# Altium PCB Motor_Breakout.PcbDoc
Units mil, origin at the board's own origin, x right, y up, seen from the top; angles counter-clockwise.
Board outline 3000 x 4000 mil, 2 copper layers (Top Layer, Bottom Layer); 23 components, 18 nets, 92 pads, 72 vias.
Unrouted connection lines stored in the file: 3.
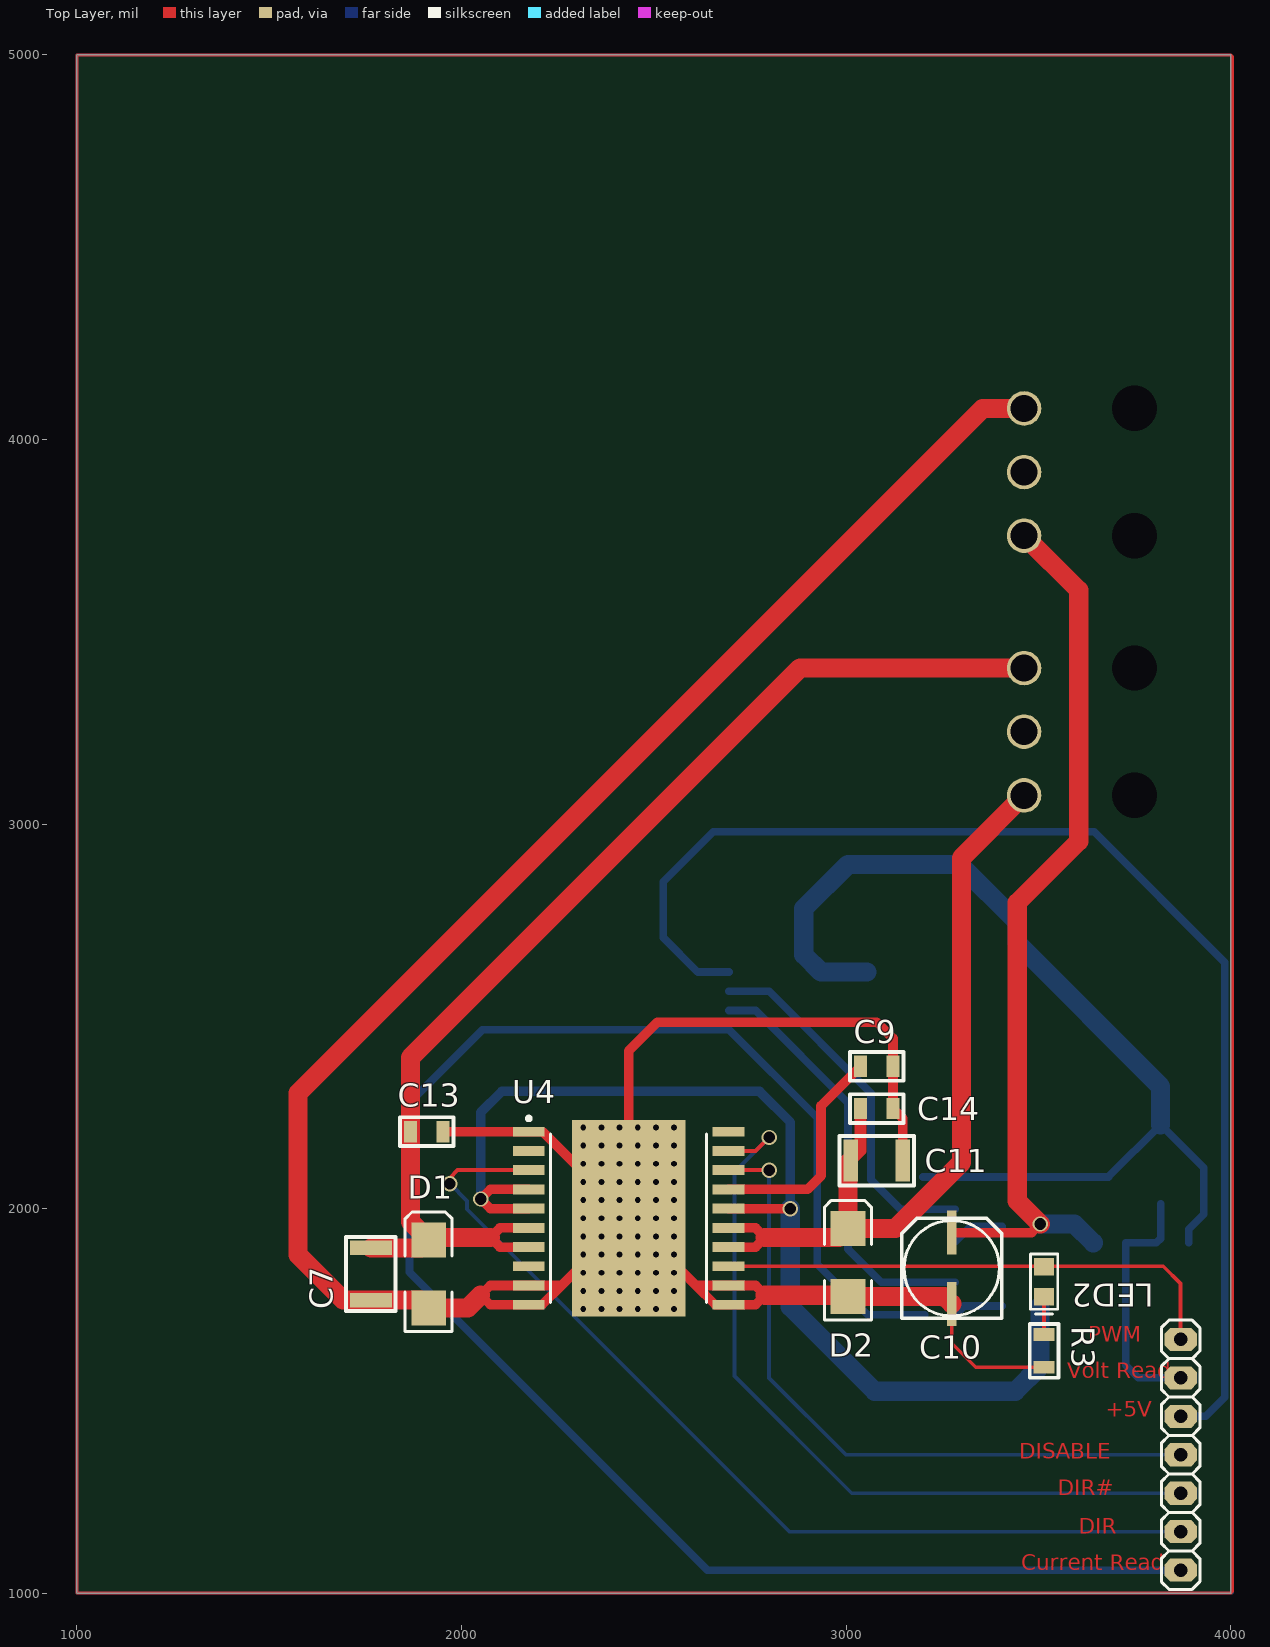
[diagram p0: Top Layer view]
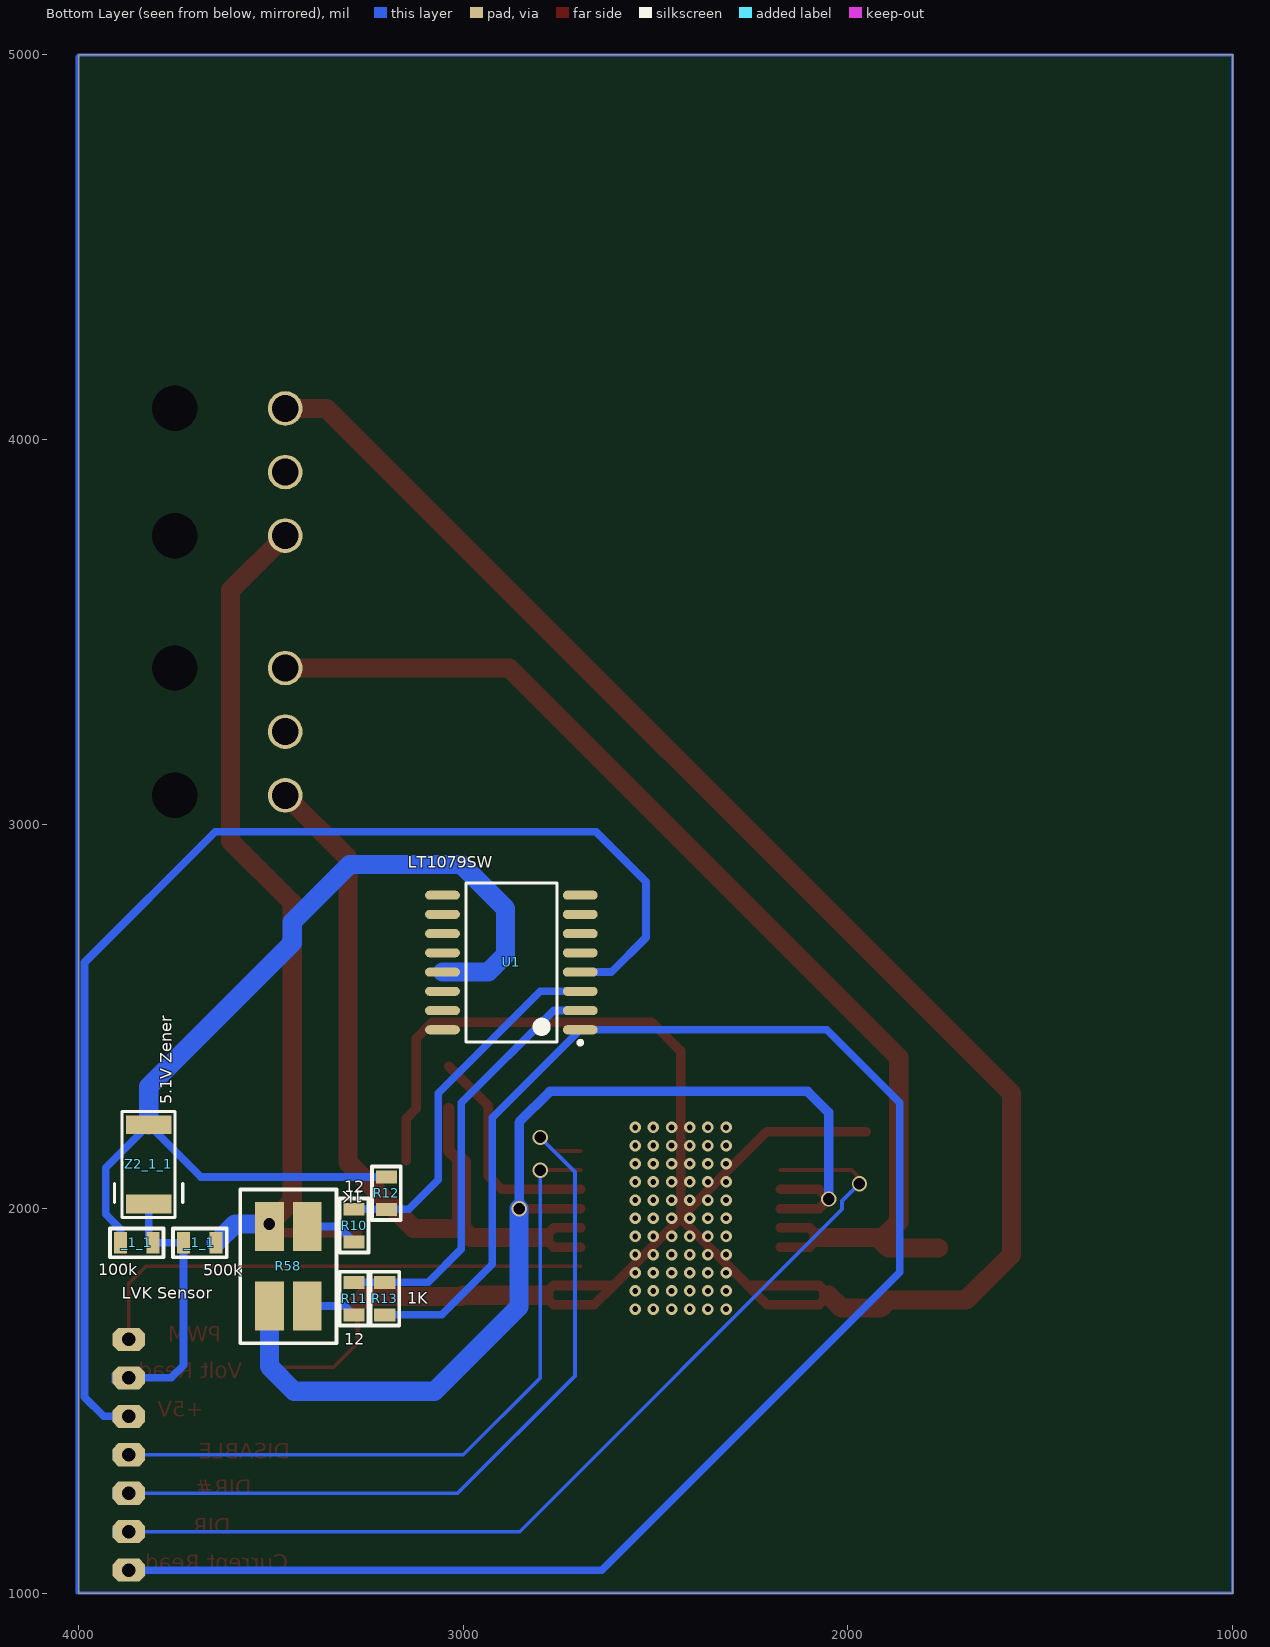
[diagram p1: Bottom Layer view, seen from below]

## Layer stack, top to bottom
Top Layer: signal copper 1.4
Dielectric: dielectric 12.6, FR-4, Dk 4.8
Bottom Layer: signal copper 1.4

## Board outline
1000,1000 4000,1000 4000,5000 1000,5000

## Design rules (kind name [scope] priority, off if disabled: settings)
Clearance [All] p1: gap=10
PolygonConnect [All] p1: connectstyle=Relief reliefconductorwidth=10 reliefentries=4 polygonreliefangle="90 Angle"
RoutingVias [All] p1: holewidth=28 width=50 viastyle="Through Hole" minholewidth=28 minwidth=50 maxholewidth=28 maxwidth=50
SilkscreenOverComponentPads [All] p1: minsilkscreentomaskgap=10
SolderMaskExpansion [All] p1: expansion=4
Width [All] p1: maxlimit=50 minlimit=10 preferedwidth=10
27 further rules are at their usual default settings.

## Classes and differential pairs
component class Motor_Breakout: C7 C9 C10 C11 C13 C14 D1 D2 LED2 R3 U4

## Components (designator, comment, footprint, x,y, rotation, side; value= is the part's Value field where it differs from the comment)
_1_1 "500k" "R 0805 (2012) RESISTOR" 3685,1911 r180 bottom
_1_1 "100k" "R 0805 (2012) RESISTOR" 3849,1911 r0 bottom
C7 "6.8uF" "R 1210 (3225) RESISTOR" 1765,1830 r90 top
C9 ".033uF" "0805 (2012) Capacitor" 3080,2370 r180 top
C10 "47uF" Radial_6.3mmDia_SM_D 3275,1845 r90 top
C11 "6.8uF" "R 1210 (3225) RESISTOR" 3080,2125 r180 top
C13 ".1uF" "0805 (2012) Capacitor" 1910,2200 r180 top
C14 ".1uF" "0805 (2012) Capacitor" 3080,2260 r180 top
D1 "1SMB26AT3" SMB 1915,1830 r90 top
D2 "1SMB26AT3" SMB 3005,1860 r90 top
LED2 "PWM" "LED 0805" 3515,1810 r90 top
R3 "1KOhm" "R 0805 (2012) RESISTOR" 3515,1630 r270 top
R10 "12" "R 0805 (2012) RESISTOR" 3284,1956 r90 bottom
R11 "12" "R 0805 (2012) RESISTOR" 3284,1766 r90 bottom
R12 "1K" "R 0805 (2012) RESISTOR" 3200,2040 r90 bottom
R13 "1K" "R 0805 (2012) RESISTOR" 3204,1766 r270 bottom
R58 "LVK Sensor" LVK24 3455,1850 r270 bottom
U1 "LT1079SW" "LT thingy" 2875,2640 r0 bottom
U4 "MC33886VW" SOP127P1420X340_HS-20N 2435,1975 r0 top
Z2_1_1 "5.1V Zener" DO-213AB_D 3818,2115 r90 bottom
? "" "Molex Mini Fit 3 prong" 3750,3915 r90 top
? "" "Molex Mini Fit 3 prong" 3750,3240 r90 top
? "" "Male 7x1" 3870,1060 r90 top

## Footprints (in the part's own frame and the unit in brackets; to place one, negate y for a bottom-side part, rotate by r counter-clockwise, add the part's x,y. Pads: shape width x height; smd on the part's side, far side on the other; paste and mask are expansions set on the pad)
"0805 (2012) Capacitor" [mm] "0805 (2012) Capacitor"
  rect 0.85x1.4 smd: 1(-1.075,0) 2(1.075,0)
  silkscreen extent -1.78,-0.95 1.78,0.95, body extent -1.19,-0.65 1.19,0.65, height 0.85
DO-213AB_D [mil] "Zener Diode 1.5V"
  rect 49x118 smd: N(-103,0) P(103,0)
  silkscreen extent -138,-89 138,89, body extent -102,-53 102,52, height 53
"LED 0805" [mm]
  rect 1.15x1.3 smd: 1(-1,0) 2(1,0)
  silkscreen extent -2.12,-0.9 1.83,0.9, body extent -1,-0.63 1,0.62, height 0.8
"LT thingy" [mm] "16-Pin Plastic Small Outline Integrated Circuit 1.27 mm Pitch, IPC Medium Density"
  oval 2.3x0.6 smd: 1(-4.55,4.445) 2(-4.55,3.175) 3(-4.55,1.905) 4(-4.55,0.635) 5(-4.55,-0.635) 6(-4.55,-1.905) 7(-4.55,-3.175) 8(-4.55,-4.445) 9(4.55,-4.445) 10(4.55,-3.175) 11(4.55,-1.905) 12(4.55,-0.635) 13(4.55,0.635) 14(4.55,1.905) 15(4.55,3.175) 16(4.55,4.445)
  silkscreen extent -4.67,-5.25 3,5.42, body extent -5.12,-5.1 5.18,5.1, height 3.5
LVK24 [mm] "Current Sense Resistor Ohmite"
  rect 3.25x1.9 smd: 0(-2.625,1.25) 1(-2.625,-1.25) 2(2.625,1.25) 3(2.625,-1.25)
  silkscreen extent -5.08,-3.18 5.08,3.18, body extent -3.17,-1.68 3.23,1.52, height 0.6
"Male 7x1" [mil]
  oct 60x85 hole 35: 1(0,0) 2(100,0) 3(200,0) 4(300,0) 5(400,0) 6(500,0) 7(600,0)
  silkscreen extent -50,-50 650,50, body extent -50,-50 650,50, height 460
"Molex Mini Fit 3 prong" [mil]
  round 90 hole 70: 1(-165.4,287) 2(0,287) 3(165.4,287)
  round 60 hole 118: -(-165.5,0) -(165.5,0)
  body extent -272,-245 272,308, height 283
"R 0805 (2012) RESISTOR" [mm] "0805 (2012) Resistor"
  rect 0.85x1.4 smd: 1(-1.075,0) 2(1.075,0)
  silkscreen extent -1.78,-0.95 1.78,0.95, body extent -1.19,-0.65 1.19,0.65, height 0.85
"R 1210 (3225) RESISTOR" [mm] "1210 (3225) Resistor"
  rect 0.95x2.8 smd: 1(-1.725,0) 2(1.725,0)
  silkscreen extent -2.45,-1.63 2.45,1.65, body extent -1.83,-1.43 1.83,1.43, height 1.81
Radial_6.3mmDia_SM_D [mm] "Surface Mount Aluminum Electrolytic Capacitor"
  rect 2.9x0.65 smd: N(-2.35,0) P(2.35,0)
  silkscreen extent -3.3,-3.3 3.3,3.3, body extent -3.16,-3.16 3.16,3.16, height 5.8
SMB [mm] "DO-214-AA/SMB; 2 C-Bend Leads; Body 5.3 x 3.6 mm, inc. leads (LxW)"
  rect 2.3x2.3 smd: 1(-2.25,0) 2(2.25,0)
  silkscreen extent -3.8,-1.55 4.1,1.55
SOP127P1420X340_HS-20N [mm] "SOP, 20-Leads, Body 11.1x7.5mm (max), Pitch 1.27mm, IPC Medium Density"
  rect 2.1x0.65 smd: 1(-6.6,5.715) 2(-6.6,4.445) 3(-6.6,3.175) 4(-6.6,1.905) 5(-6.6,0.635) 6(-6.6,-0.635) 7(-6.6,-1.905) 8(-6.6,-3.175) 9(-6.6,-4.445) 10(-6.6,-5.715) 11(6.6,-5.715) 12(6.6,-4.445) 13(6.6,-3.175) 14(6.6,-1.905) 15(6.6,-0.635) 16(6.6,0.635) 17(6.6,1.905) 18(6.6,3.175) 19(6.6,4.445) 20(6.6,5.715)
  rect 7.5x13 smd: 21(0,0)
  silkscreen extent -6.72,-5.55 5.15,6.71, body extent -3.75,-5.55 3.75,5.55, height 3.4

## Part data
C7 C9 C11 C13 C14: library part "Capacitor (non-polarized)", "Capacitor"
C10: library part "Capacitor (polarized)", "Capacitor (polarized)"
D1 D2: library part "D Schottky", "Schottky Diode"
LED2: library part LED, "Standard LED"
R3 R10 R11 R12 R13: library part Resistor, "Resistor"
U1: "Micropower, Quad, Single Supply, Precision Operational Amplifier"
U4: "Motor Controller"

## Via types
v1: diameter 30, hole 15, Top Layer to Bottom Layer, tented top, 66 vias
v2: diameter 40, hole 30, Top Layer to Bottom Layer, 6 vias

## Nets (pads, with @x,y where several pads share a name; then routed paths per layer and width w, separated by ;. In a path a pad name is that pad's centre, name@x,y a point inside that pad or via, vN(x,y) a via of type N, cw(c..) or ccw(c..) an arc to the next point about the centre after c; other vN are vias at no path point)
+5V: ?.5 U1.4 | length 3273.5
  Bottom Layer w20: U1.4 2615,2615 2525,2705 2525,2757.41 2525,2850 2655,2980 3645,2980 3985,2640 3985,1510 3935,1460 ?.5
BATT+: ?.1@3463,3749.6 _1_1.2@3642.68,1911 C10.P R58.1 R58.3 U4.4 U4.5 U4.16 | length 4078.9
  Top Layer w25: U4.5 2075,2000 v2(2050,2025) 2075,2050 U4.4 ; U4.16 v2(2855,2000) ; C10.P 3482.52,1937.52 v2(3505,1960)
  Top Layer w50: ?.1@3463,3749.6 3605,3607.6 3605,2955 3445,2795 3445,2020 v2(3505,1960)
  Bottom Layer w25: v2(2050,2025) 2050,2250 2105,2305 2775,2305 2855,2225 v2(2855,2000)
  Bottom Layer w50: v2(3505,1960) 3593.68,1960 _1_1.2@3642.68,1911
Cs1: ?.1@3870,1060 R13.2 U1.1 | length 4713.9
  Bottom Layer w20: R13.2 3056.32,1723.68 2925,1855 2925,2235.87 U1.1 2055,2465 1865,2275 1865,1835 2640,1060 ?.1@3870,1060
cs2: R11.2 R13.1 U1.2 | length 1103.4
  Bottom Layer w20: U1.2 2765,2515 3005,2275 3005,1895 3091.68,1808.32 R13.1 R11.2
cs3: R10.2 R12.1 U1.3 | length 954.7
  Bottom Layer w20: U1.3 2800,2565 3065,2300 3065,2075 3141.68,1998.32 3194,1998.32 R10.2
CS+: R10.1 R58.0 | length 138.2
  Bottom Layer w20: R10.1 3323.67,1953.35 R58.0
CS-: R11.1 R58.2 | length 131.3
  Bottom Layer w20: R11.1 3306.98,1746.65 R58.2
"Current Read": 
DIR: ?.2@3870,1160 U4.3 | length 2516.1
  Top Layer w10: v2(1970,2065) 1970,2080 1990,2100 U4.3
  Bottom Layer w10: v2(1970,2065) 2015,2020 2015,1998.24 2853.24,1160 ?.2@3870,1160
DISABLE: ?.4 U4.18 | length 1798
  Top Layer w10: U4.18 v2(2800,2100)
  Bottom Layer w10: v2(2800,2100) 2800,1560 3000,1360 ?.4
GND: ?.3@3463,4080.4 _1_1.2@3891.32,1911 C7.1 C9.1 C10.N C11.1 C13.1 C14.1 D1.1 D2.1 R3.2 R12.2 U1.13 U4.1 U4.9 U4.10 U4.11 U4.12 U4.21 Z2_1_1.P | length 10574.5
  Top Layer w10: C10.N 3275,1650 3337.32,1587.68 R3.2@3510,1587.68
  Top Layer w25: C13.1 U4.1 2211.11,2200 U4.21@2435,1976.11 ; C11.1 3147.91,2234.41 C14.1 C9.1 3122.32,2442.68 3080,2485 2510,2485 2435,2410 U4.21@2435,1976.11 ; 2260,1800 U4.9 2075,1800 2050,1775 2075,1750 U4.10 2210,1750 2260,1800 ; 2260,1800 U4.21 ; U4.21 U4.21@2435,1976.11 ; U4.21 2610,1800 ; 2610,1800 U4.12 2765,1800 2790,1775 2765,1750 U4.11 2660,1750 2610,1800
  Top Layer w50: 2050,1775 2016.42,1741.42 D1.1 1894.33,1762.09 C7.1 1692.91,1762.09 1575,1880 1575,2300 3355.4,4080.4 ?.3@3463,4080.4 ; 2790,1775 3001.42,1775 D2.1 3256.06,1771.42 C10.N
  Bottom Layer w20: R12.2 3682.32,2082.32 Z2_1_1.P 3930,2106 3930,1985 3891.32,1946.32 _1_1.2@3891.32,1911
  Bottom Layer w50: U1.13 2935,2615 2890,2660 2890,2780 3005,2895 3295,2895 3445,2745 3445,2690.35 3818,2317.35 Z2_1_1.P
  other v1: 2316.89,1738.78 2364.13,1738.78 2411.38,1738.78 2458.62,1738.78 2505.87,1738.78 2553.11,1738.78 2316.89,1786.02 2364.13,1786.02 2411.38,1786.02 2458.62,1786.02 2505.87,1786.02 2553.11,1786.02 2316.89,1833.27 2364.13,1833.27 2411.38,1833.27 2458.62,1833.27 2505.87,1833.27 2553.11,1833.27 2316.89,1880.51 2364.13,1880.51 2411.38,1880.51 2458.62,1880.51 2505.87,1880.51 2553.11,1880.51 2316.89,1927.76 2364.13,1927.76 2411.38,1927.76 2458.62,1927.76 2505.87,1927.76 2553.11,1927.76 2316.89,1975 2364.13,1975 2411.38,1975 2458.62,1975 2505.87,1975 2553.11,1975 2316.89,2022.24 2364.13,2022.24 2411.38,2022.24 2458.62,2022.24 2505.87,2022.24 2553.11,2022.24 2316.89,2069.49 2364.13,2069.49 2411.38,2069.49 2458.62,2069.49 2505.87,2069.49 2553.11,2069.49 2316.89,2116.73 2364.13,2116.73 2411.38,2116.73 2458.62,2116.73 2505.87,2116.73 2553.11,2116.73 2316.89,2163.98 2364.13,2163.98 2411.38,2163.98 2458.62,2163.98 2505.87,2163.98 2553.11,2163.98 2316.89,2211.22 2364.13,2211.22 2411.38,2211.22 2458.62,2211.22 2505.87,2211.22 2553.11,2211.22
MOTOR+: ?.3@3463,3405.4 C7.2 C13.2 D1.2 U4.6 U4.7 | length 3050.7
  Top Layer w25: U4.7 2100,1900 2075,1925 2100,1950 U4.6
  Top Layer w50: C7.2 1894.33,1897.91 D1.2 ; 2075,1925 1921.42,1925 D1.2 ; ?.3@3463,3405.4 2880.4,3405.4 1867.68,2392.68 C13.2 1867.68,1965.91 D1.2
MOTOR-: ?.1@3463,3074.6 C11.2 C14.2 D2.2 U4.14 U4.15 | length 2148.9
  Top Layer w25: U4.14 2765,1900 2790,1925 2765,1950 U4.15
  Top Layer w30: C11.2@3005,2117.91 C11.2 3037.68,2150.59 C14.2
  Top Layer w50: 2790,1925 2981.42,1925 D2.2 ; C11.2@3005,2117.91 D2.2 ; ?.1@3463,3074.6 3300,2911.6 3300,2120 3128.58,1948.58 D2.2
NetC9_2: C9.2 U4.17 | length 582.2
  Top Layer w25: U4.17 2900,2050 2935,2085 2935,2267.32 C9.2
NetLED2_1: LED2.1 R3.1 | length 105.4
  Top Layer w10: R3.1@3510,1672.32 3515,1677.32 LED2.1@3515,1775.63
PWM: ?.7 LED2.2 U4.13 | length 1338.8
  Top Layer w10: U4.13 3825,1850 3870,1805 ?.7
"Voltage Read": ?.6 _1_1.1 Z2_1_1.N | length 659.6
  Bottom Layer w20: Z2_1_1.N 3818,1922.32 3806.68,1911 3727.32,1911 3727.32,1592.68 3760,1560 ?.6
~DIR: ?.3@3870,1260 U4.19 | length 2063.3
  Top Layer w10: U4.19 2765,2150 v2(2800,2185)
  Bottom Layer w10: v2(2800,2185) 2710,2095 2710,1565 3015,1260 ?.3@3870,1260
pads on no net: ?.2@3463,3240 ?.2@3463,3915 ?.- U1.5 U1.6 U1.7 U1.8 U1.9 U1.10 U1.11 U1.12 U1.14 U1.15 U1.16 U4.2 U4.8 U4.20
copper on no net: | length 29190.6
  Top Layer w7.87: 4000,5000 1000,5000 1000,1000 4000,1000 4005,1005 4005,4995 ; 4000,5000 4005,4995 ; 4000,5000 4005,4995
  Bottom Layer w7.87: 4000,5000 1000,5000 1000,1000 4005,1000 4005,4995
  Bottom Layer w50: 2855,2000 2855,1745 3075,1525 3440,1525 3504.21,1589.21 3504.21,1746.65

## Other copper
Top Layer:
  text "PWM" at 3630,1640 h70
  text "Volt Read" at 3575,1545 h70
  text "+5V" at 3675,1445 h70
  text "DISABLE" at 3450,1335 h70
  text "DIR#" at 3550,1240 h70
  text "DIR" at 3605,1140 h70
  text "Current Read" at 3455,1045 h70
Bottom Layer:
  rectangle net "Voltage Read": 3829.72,1547.24 3914.37,1572.83
  rectangle net +5V: 3828.74,1445.87 3913.39,1471.46
  rectangle net DISABLE: 3827.76,1346.22 3912.4,1371.81
  rectangle net ~DIR: 3828.74,1246.22 3913.39,1271.81
  rectangle net DIR: 3827.76,1144.68 3912.4,1170.28
  rectangle net Cs1: 3826.77,1044.29 3911.42,1069.88